# Altium PCB PCB1.PcbDoc
Units mm, origin at the board's own origin, x right, y up, seen from the top; angles counter-clockwise.
Board outline 86.71 x 68.58 mm, 2 copper layers (Top Layer, Bottom Layer), stack 1.569 mm thick; 33 components, 57 nets, 206 pads, 2 vias.
Unrouted connection lines stored in the file: 17.
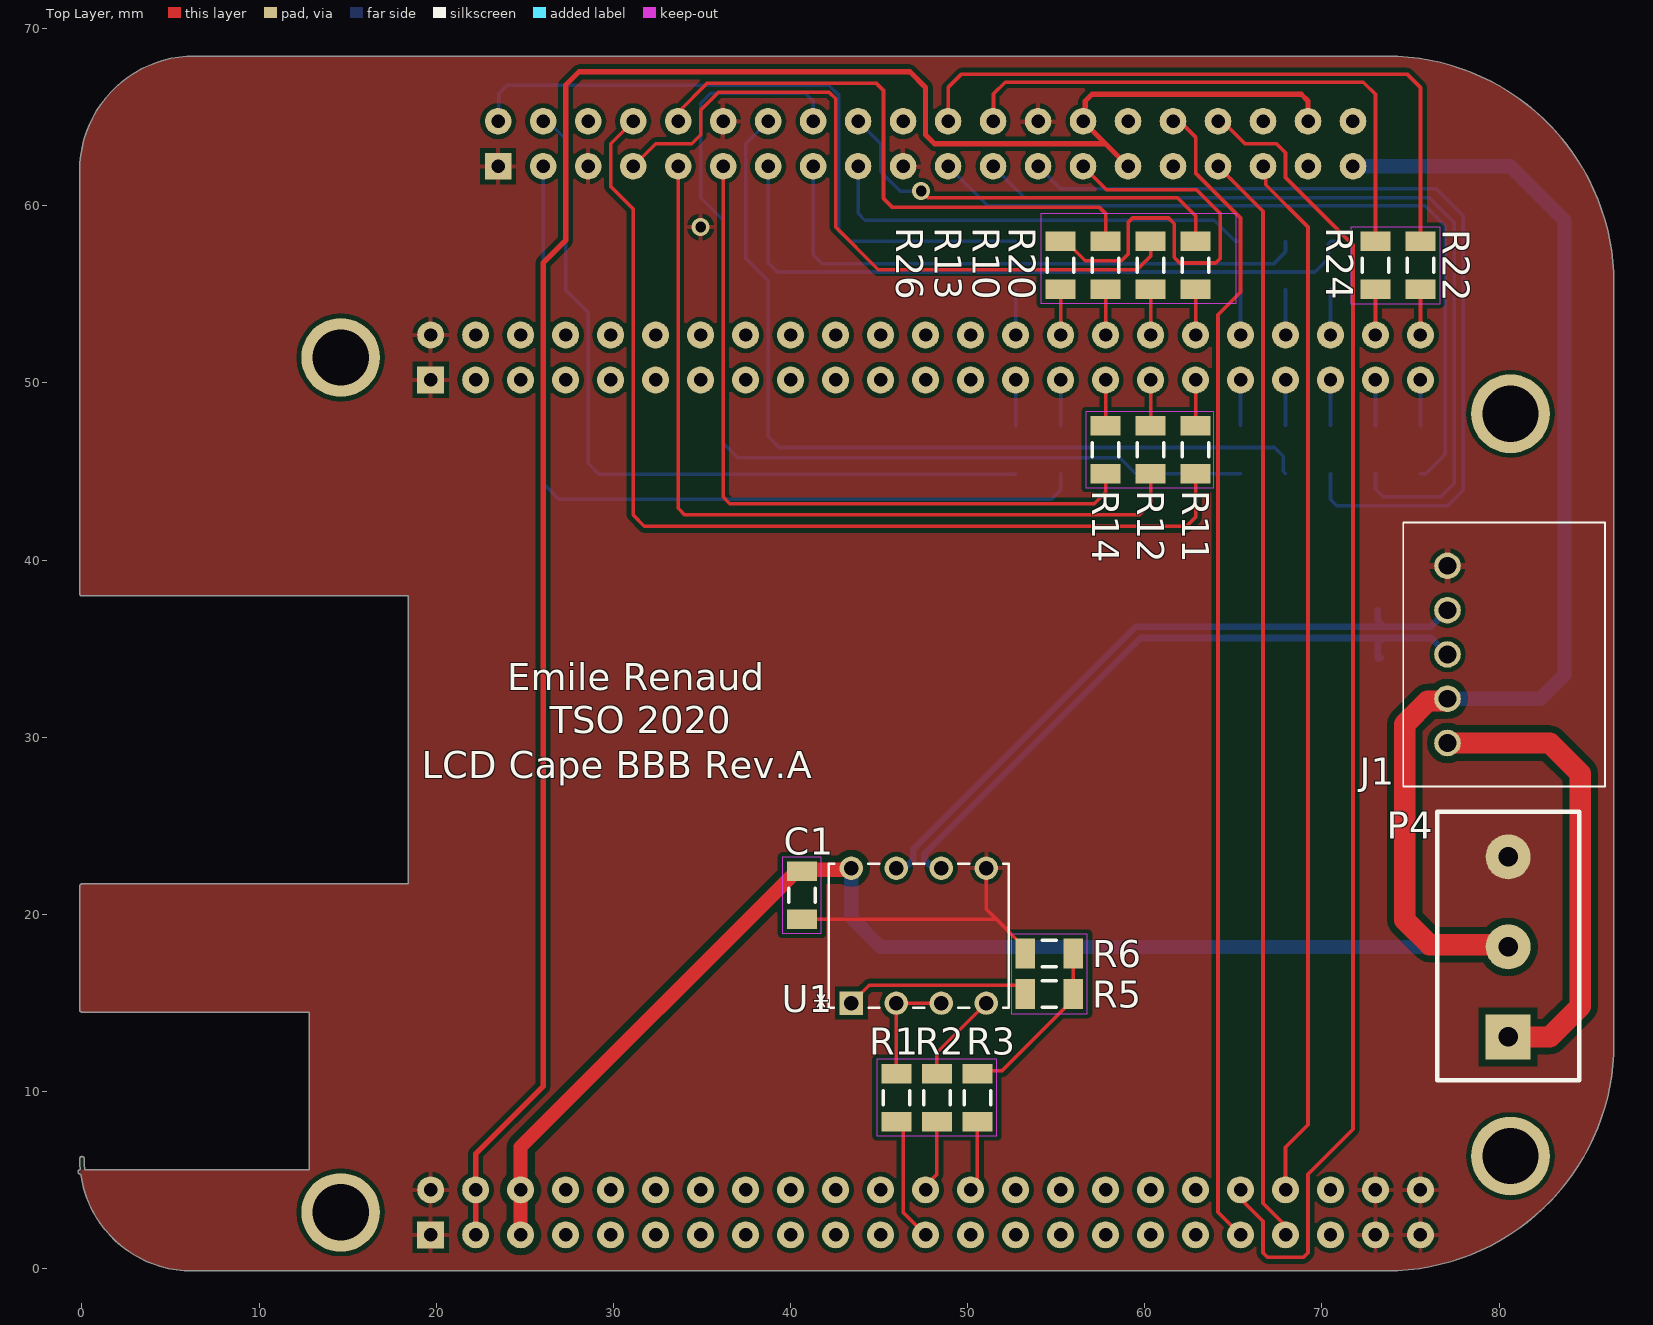
[diagram p0: Top Layer view]
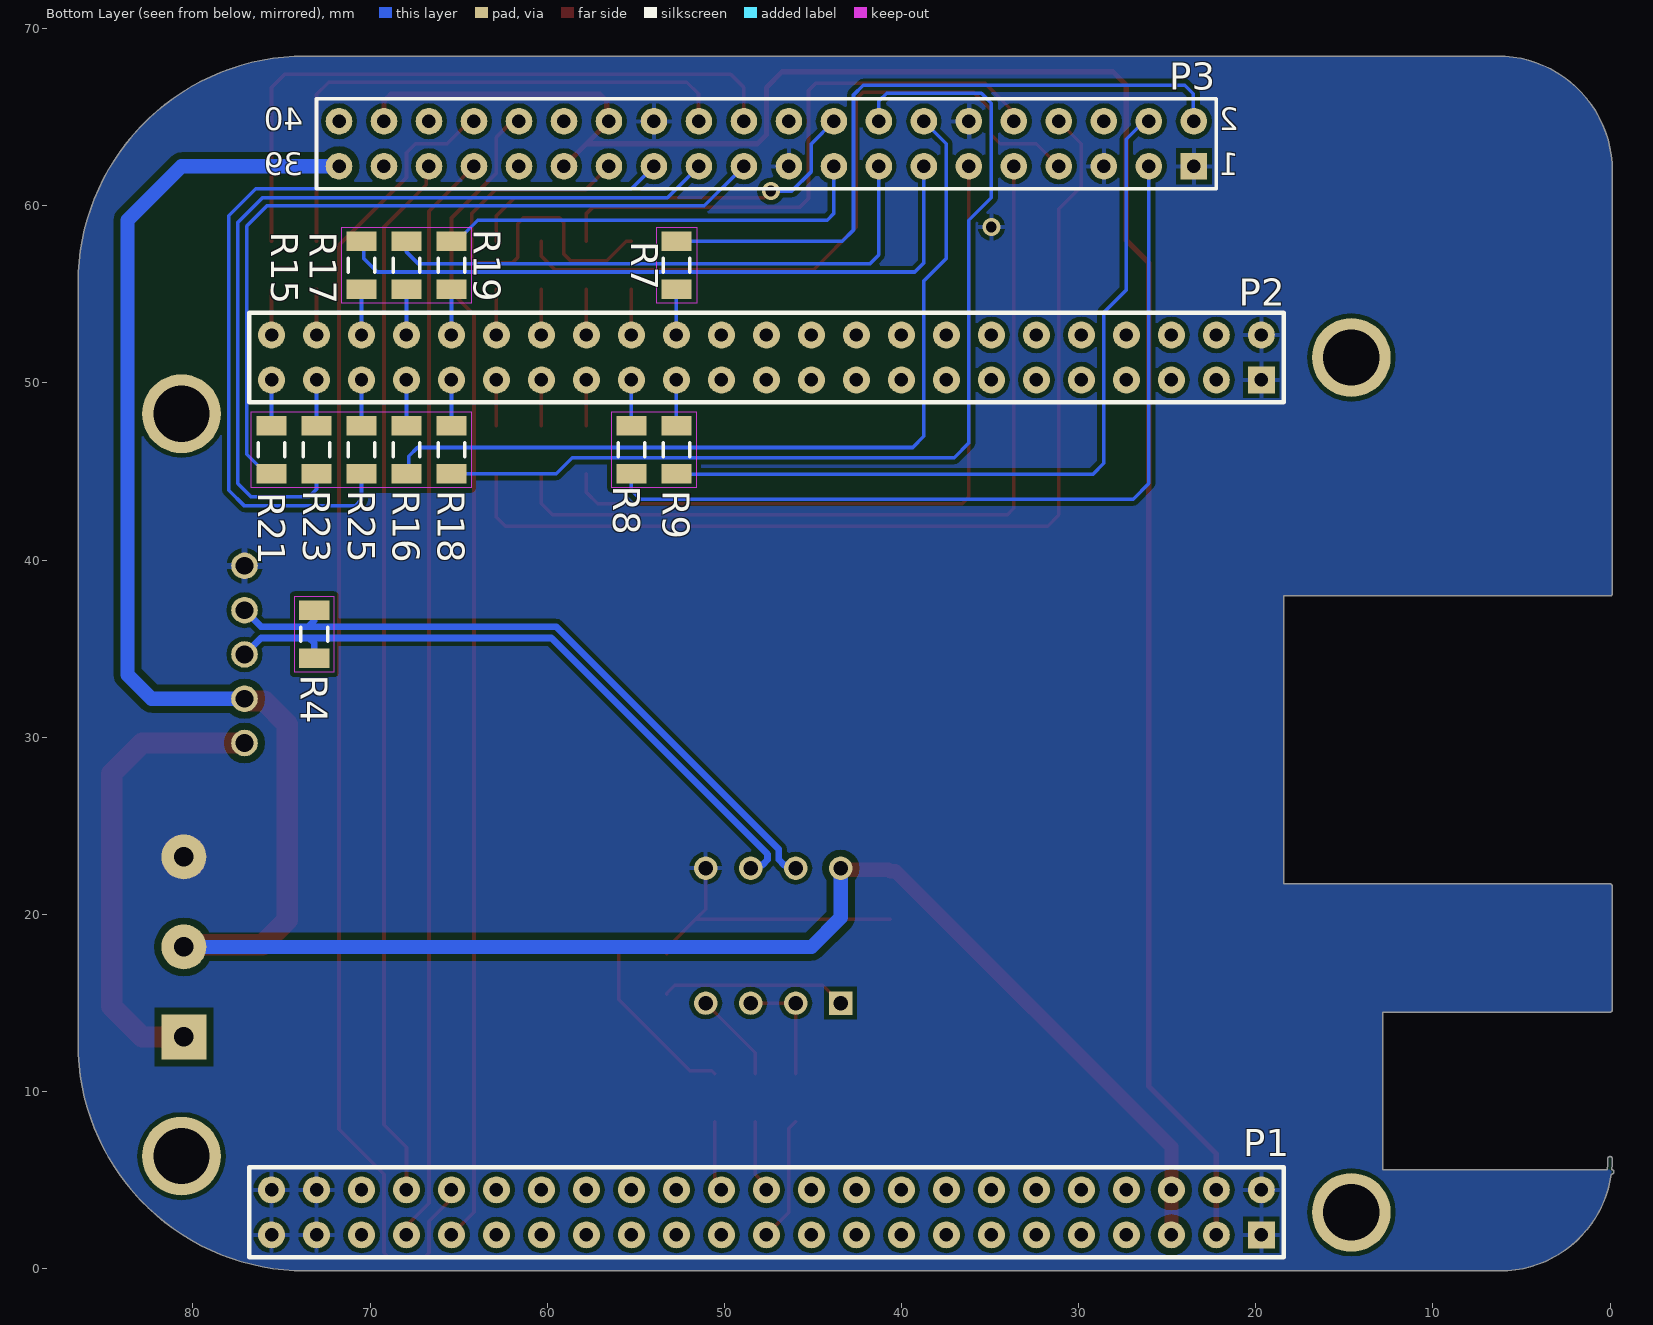
[diagram p1: Bottom Layer view, seen from below]

## Layer stack, top to bottom
Top Solder: solder mask 0.0254, SM-001, Dk 4
Top Layer: signal copper 0.035
Dielectric 1: core 1.4986, Core-043, Dk 4.3
Bottom Layer: signal copper 0.035
Bottom Solder: solder mask 0.0254, SM-001, Dk 4

## Board outline
-0.093,5.334 cw(c-0.093,5.461) -0.098,5.588 cw(c6.202,6.202) -0.127,6.202 cw(c0,6.202) 0.127,6.202 ccw(c6.202,6.202) 0.158,5.588 12.827,5.588 12.827,14.478 0,14.478 cw(c0,14.605) -0.127,14.605 -0.127,21.59 cw(c0,21.59) 0,21.717 18.415,21.717 18.415,37.973 0,37.973 cw(c0,38.1) -0.127,38.1 -0.127,61.976 cw(c6.35,61.976) 6.35,68.453 73.66,68.453 cw(c73.66,55.626) 86.487,55.626 86.487,12.7 cw(c73.66,12.7) 73.66,-0.127 6.202,-0.127 cw(c6.202,6.202) -0.068,5.334

## Design rules (kind name [scope] priority, off if disabled: settings)
Clearance Clearance_Power [InNet('+12') or InNet('5V')] p1: gap=0.381 ignorepadtopadclearanceinfootprint=FALSE
Clearance [All] p2: gap=0.254 ignorepadtopadclearanceinfootprint=FALSE except(0: Arc-Hole Track-Hole SMDPad-Hole THPad-Hole Via-Hole Fill-Hole Poly-Hole Region-Hole Text-Hole)
DiffPairsRouting [All] p1: maxlimit=0.254 minlimit=0.254 mostfreqgap=0.254 toplayer_minwidth=0.381 toplayer_maxwidth=0.381 toplayer_prefwidth=0.381 bottomlayer_minwidth=0.381 bottomlayer_maxwidth=0.381 bottomlayer_prefwidth=0.381 maxuncoupledlength=12.7
HoleSize [All] p1: absolutevalues=TRUE maxlimit=3.175 minlimit=0.025 maxpercent=80.000 minpercent=20.000
PolygonConnect [All] p1: connectstyle=Relief reliefconductorwidth=0.254 reliefentries=4 polygonreliefangle="90 Angle" airgapwidth=0.254
RoomDefinition "LCD Cape" [InComponentClass('LCD Cape')] p1 off: confinementstyle=ConfineIn formatcopy=TRUE lockcomponents=FALSE outline 87.612,1.529 296.654,1.529 296.654,59.822 87.612,59.822
RoutingVias [All] p1: holewidth=0.711 width=1 viastyle="Through Hole" minholewidth=0.2 minwidth=0.45 maxholewidth=0.6 maxwidth=1.27
SilkToSilkClearance [All] p1 off: silktosilkclearance=0.254
SilkToSolderMaskClearance [IsPad] p1 off: minsilkscreentomaskgap=0.254 clearancetoexposedcopper=TRUE
SolderMaskExpansion [All] p1: expansion=0.102 istentingtop=FALSE
Width Width_Power [InNet('+12') or InNet('5V')] p1: maxlimit=1.2 minlimit=0.2 preferedwidth=1.2 minimp=50.000000 maximp=50.000000 favimp=50.000000
Width [All] p2: maxlimit=0.3 minlimit=0.2 preferedwidth=0.2 minimp=50.000000 maximp=50.000000 favimp=50.000000
26 further rules are at their usual default settings.

## Classes and differential pairs
differential pair RS: +RS_P -RS_N

## Components (designator, comment, footprint, x,y, rotation, side; value= is the part's Value field where it differs from the comment)
C1 "Capacitor 1206" C1206 40.64,21.082 r90 top value=0.1uF
J1 "Motor Out" "JST 5POS 2.5mm 90°" 77.089,29.671 r270 top
P1 "Header 23x2" "Header 23x2" 47.625,3.175 r0 bottom locked
P2 "Header 23x2" "Header 23x2" 47.625,51.435 r0 bottom locked
P3 "LCD" HDR2X20 23.495,62.23 r0 bottom
P4 "Power In" "Weco 3" 80.518,18.161 r90 top
R1 "Res1" C1206 45.974,9.652 r270 top value=0R
R2 "Res1" C1206 48.26,9.652 r90 top value=0R
R3 "Res1" C1206 50.546,9.652 r90 top value=0R
R4 "Res1" C1206 73.152,35.814 r90 bottom value=120R
R5 "Res1" C1206 54.61,15.494 r0 top value=1K
R6 "Res1" C1206 54.61,17.78 r180 top value=1K
R7 "Res1" C1206 52.705,56.642 r270 bottom value=30R
R8 "Res1" C1206 55.245,46.228 r270 bottom value=30R
R9 "Res1" C1206 52.705,46.228 r90 bottom value=30R
R10 "Res1" C1206 60.325,56.642 r90 top value=30R
R11 "Res1" C1206 62.865,46.228 r90 top value=30R
R12 "Res1" C1206 60.325,46.228 r270 top value=30R
R13 "Res1" C1206 57.785,56.642 r270 top value=30R
R14 "Res1" C1206 57.785,46.228 r270 top value=30R
R15 "Res1" C1206 70.485,56.642 r90 bottom value=30R
R16 "Res1" C1206 67.945,46.228 r90 bottom value=30R
R17 "Res1" C1206 67.945,56.642 r90 bottom value=30R
R18 "Res1" C1206 65.405,46.228 r90 bottom value=30R
R19 "Res1" C1206 65.405,56.642 r90 bottom value=30R
R20 "Res1" C1206 62.865,56.642 r270 top value=30R
R21 "Res1" C1206 75.565,46.228 r270 bottom value=30R
R22 "Res1" C1206 75.565,56.642 r270 top value=30R
R23 "Res1" C1206 73.025,46.228 r270 bottom value=30R
R24 "Res1" C1206 73.025,56.642 r270 top value=30R
R25 "Res1" C1206 70.485,46.228 r270 bottom value=30R
R26 "Res1" C1206 55.245,56.642 r90 top value=30R
U1 "MAX485CPA+" "DIP 8 - 3D" 51.054,22.606 r90 top value=Value

## Footprints (in the part's own frame and the unit in brackets; to place one, negate y for a bottom-side part, rotate by r counter-clockwise, add the part's x,y. Pads: shape width x height; smd on the part's side, far side on the other; paste and mask are expansions set on the pad)
C1206 [mm] "Chip Capacitor, Body 3.2x1.6mm, IPC High Density"
  rect 1.1x1.7 smd: 1(-1.35,0) 2(1.35,0)
  silkscreen extent -0.4,-0.75 0.4,0.75, body extent -1.7,-0.9 1.7,0.9, height 1.3
"DIP 8 - 3D" [mil]
  rect 52x52 hole 32: 1(-300,300)
  round 52 hole 32: 2(-300,200) 3(-300,100) 4(-300,0) 5(0,0) 6(0,100) 7(0,200) 8(0,300)
  silkscreen extent -310,-50 10,350, body extent -310,-45 10,345, height 185
HDR2X20 [mm] "Connector; Header; 20x2 Position"
  rect 1.5x1.5 hole 0.762: 1(0,0)
  round 1.5 hole 0.762: 2(0,-2.54) 3(2.54,0) 4(2.54,-2.54) 5(5.08,0) 6(5.08,-2.54) 7(7.62,0) 8(7.62,-2.54) 9(10.16,0) 10(10.16,-2.54) 11(12.7,0) 12(12.7,-2.54) 13(15.24,0) 14(15.24,-2.54) 15(17.78,0) 16(17.78,-2.54) 17(20.32,0) 18(20.32,-2.54) 19(22.86,0) 20(22.86,-2.54) 21(25.4,0) 22(25.4,-2.54) 23(27.94,0) 24(27.94,-2.54) 25(30.48,0) 26(30.48,-2.54) 27(33.02,0) 28(33.02,-2.54) 29(35.56,0) 30(35.56,-2.54) 31(38.1,0) 32(38.1,-2.54) 33(40.64,0) 34(40.64,-2.54) 35(43.18,0) 36(43.18,-2.54) 37(45.72,0) 38(45.72,-2.54) 39(48.26,0) 40(48.26,-2.54)
  silkscreen extent -1.27,-3.81 49.53,1.27
"Header 23x2" [mil]
  rect 60x60 hole 30: 1(-1100,50)
  round 60 hole 30: 2(-1100,-50) 3(-1000,50) 4(-1000,-50) 5(-900,50) 6(-900,-50) 7(-800,50) 8(-800,-50) 9(-700,50) 10(-700,-50) 11(-600,50) 12(-600,-50) 13(-500,50) 14(-500,-50) 15(-400,50) 16(-400,-50) 17(-300,50) 18(-300,-50) 19(-200,50) 20(-200,-50) 21(-100,50) 22(-100,-50) 23(0,50) 24(0,-50) 25(100,50) 26(100,-50) 27(200,50) 28(200,-50) 29(300,50) 30(300,-50) 31(400,50) 32(400,-50) 33(500,50) 34(500,-50) 35(600,50) 36(600,-50) 37(700,50) 38(700,-50) 39(800,50) 40(800,-50) 41(900,50) 42(900,-50) 43(1000,50) 44(1000,-50) 45(1100,50) 46(1100,-50)
  silkscreen extent -1150,-100 1150,100
"JST 5POS 2.5mm 90°" [mm]
  round 1.5 hole 1: 1(0,0) 2(-2.5,0) 3(-5,0) 4(-7.5,0) 5(-10,0)
  silkscreen extent -12.45,-2.5 2.45,8.9, body extent -12.45,-2.5 2.45,8.9, height 6.1
"Weco 3" [mm]
  rect 2.54x2.54 hole 1.1: 1(-5.08,0)
  round 2.54 hole 1.1: 2(0,0) 3(5.08,0)
  silkscreen extent -7.54,-4 7.62,4, body extent -7.54,-4 7.62,4, height 10

## Part data
C1: "Capacitor SMD 1206", Manufacturer_Part_Number=12065A820JAT2A, Built_By=EMA_UL_Team, Copyright="Copyright (C) 2018 Accelerated Designs. All rights reserved", RefDes=RefDes, Type=DEV, Vendor="AVX Corporation"
J1: library part "JST 5POS", "Connector", Manufacturer_Name="JST (JAPAN SOLDERLESS TERMINALS)", Manufacturer_Part_Number=S5B-XH-A-1(LF)(SN), Datasheet Link=http://www.jst-mfg.com/product/pdf/eng/eXH.pdf, Height=6.1mm
P3: library part "Header 20X2", "Header, 20-Pin, Dual row", LatestRevisionDate=17-Jul-2002, LatestRevisionNote="Re-released for DXP Platform.", Publisher="Altium Limited"
P4: library part "Header 3", "Header, 3-Pin", LatestRevisionDate=17-Jul-2002, LatestRevisionNote="Re-released for DXP Platform.", Publisher="Altium Limited"
R1 R2 R3 R4 R5 R6 R7 R8 R9 R10 R11 R12 R13 R14 R15 R16 R17 R18 R19 R20 R21 R22 R23 R24 R25 R26: "Resistor", LatestRevisionDate=17-Jul-2002, LatestRevisionNote="Re-released for DXP Platform.", PackageDescription="Axial Device, Thru-Hole; 2 Leads; 0.3 in Pin Spacing", PackageReference=AXIAL-0.3, Published=8-Jun-2000, Publisher="Altium Limited"
U1: "RS485 Communication", Built_By=EMA_UL_Team, Copyright="Copyright (C) 2018 Accelerated Designs. All rights reserved", Manufacturer_Part_Number=MAX485CPA+, RefDes=RefDes, Type=DEV, Vendor="Maxim Integrated Products"

## Free pads (board coordinates)
  round 4.445 hole 3.175: 28(14.605,3.175) 29(80.645,6.35) 30(80.645,48.26) 31(14.605,51.435)

## Via types
v1: diameter 1, hole 0.6, Top Layer to Bottom Layer, 2 vias

## Nets (pads, with @x,y where several pads share a name; then routed paths per layer and width w, separated by ;. In a path a pad name is that pad's centre, name@x,y a point inside that pad or via, vN(x,y) a via of type N, cw(c..) or ccw(c..) an arc to the next point about the centre after c; other vN are vias at no path point)
3.3V: P1.3 P1.4 P3.28 P3.29 P3.38 | length 119.9
  Top Layer w0.2: P3.28 P3.28@56.642,64.897
  Top Layer w0.3: P1.3 P1.4 22.225,6.477 26.035,10.287 26.035,56.769 27.305,58.039 27.305,66.802 28.067,67.564 46.736,67.564 47.625,66.675 47.625,64.008 48.133,63.5 57.785,63.5 ; P3.28 57.785,63.5 ; P3.28@56.642,64.897 56.642,65.913 57.023,66.294 68.834,66.294 69.215,65.913 P3.38 ; P3.29 57.785,63.5
5V: C1.2 J1.2 P1.5 P1.6 P3.39 P4.2 U1.8 | length 137.3
  Top Layer w0.8: P1.5 P1.6 24.765,6.857 40.34,22.432 C1.2 40.727,22.519 43.347,22.519 U1.8 ; J1.2@76.955,32.037 J1.2 ; P4.2@80.391,18.288 P4.2
  Top Layer w1.2: J1.2@76.955,32.037 75.979,32.037 74.676,30.734 74.676,19.685 76.073,18.288 P4.2@80.391,18.288
  Bottom Layer w0.8: U1.8 43.434,19.812 45.085,18.161 P4.2 ; P3.39 80.645,62.23 83.693,59.182 83.693,33.528 82.336,32.171 J1.2
+12: J1.1 P4.1 | length 26.1
  Top Layer w1.2: J1.1 82.859,29.671 84.582,27.948 84.582,14.804 82.859,13.081 P4.1
AIN_0: P1.39 P3.33 | length 61.9
  Top Layer w0.2: P3.33 66.675,59.69 66.675,3.683 67.772,2.586 67.772,2.078 P1.39
AIN_1: P1.40 P3.35 | length 59.4
  Top Layer w0.2: P3.35 66.836,62.069 66.836,61.18 69.215,58.801 69.215,8.128 67.945,6.858 P1.40
AIN_2: P1.37 P3.32 | length 65.7
  Top Layer w0.2: P3.32 61.666,64.699 62.047,64.699 62.865,63.881 62.865,61.849 65.405,59.309 65.405,55.118 64.135,53.848 64.135,3.175 P1.37
AIN_3: P1.38 P3.34 | length 76.1
  Top Layer w0.2: P3.34 64.389,64.77 65.659,63.5 67.437,63.5 67.945,62.992 67.945,61.595 71.755,57.785 71.755,7.874 69.215,5.334 69.215,0.889 68.961,0.635 66.929,0.635 66.675,0.889 66.675,2.667 65.405,3.937 P1.38
GND: C1.1 J1.5 P1.1 P1.2 P1.43 P1.44 P1.45 P1.46 P2.1 P2.2 P3.1 P3.5 P3.12 P3.19 P3.26 P4.3 R6.2 U1.5 | length 16.7
  Top Layer w0.2: C1.1 51.608,19.732 ; U1.5 51.054,20.286 51.608,19.732 ; R6.2 53.26,18.08 51.608,19.732
  other v1: 34.925,58.801
LCD_AC_BIAS: P2.30 R26.1 | length 2.6
  Top Layer w0.2: P2.30 R26.1
LCD_DATA_0: P2.45 R21.1 | length 2.6
  Bottom Layer w0.2: R21.1 P2.45
LCD_DATA_1: P2.46 R22.2 | length 2.6
  Top Layer w0.2: P2.46 R22.2
LCD_DATA_2: P2.43 R23.1 | length 2.6
  Bottom Layer w0.2: R23.1 P2.43
LCD_DATA_3: P2.44 R24.2 | length 2.6
  Top Layer w0.2: P2.44 R24.2
LCD_DATA_4: P2.41 R25.1 | length 2.6
  Bottom Layer w0.2: R25.1 P2.41
LCD_DATA_5: P2.42 R15.1 | length 2.6
  Bottom Layer w0.2: P2.42 R15.1
LCD_DATA_6: P2.39 R16.2 | length 2.6
  Bottom Layer w0.2: R16.2 P2.39
LCD_DATA_7: P2.40 R17.1 | length 2.6
  Bottom Layer w0.2: P2.40 R17.1
LCD_DATA_8: P2.37 R18.2 | length 2.6
  Bottom Layer w0.2: R18.2 P2.37
LCD_DATA_9: P2.38 R19.1 | length 2.6
  Bottom Layer w0.2: P2.38 R19.1
LCD_DATA_10: P2.35 R11.2 | length 2.6
  Top Layer w0.2: R11.2 P2.35
LCD_DATA_11: P2.36 R20.2 | length 2.6
  Top Layer w0.2: P2.36 R20.2
LCD_DATA_12: P2.33 R12.1 | length 2.6
  Top Layer w0.2: R12.1 P2.33
LCD_DATA_13: P2.34 R10.1 | length 2.6
  Top Layer w0.2: P2.34 R10.1
LCD_DATA_14: P2.31 R14.1 | length 2.6
  Top Layer w0.2: R14.1 P2.31
LCD_DATA_15: P2.32 R13.2 | length 2.6
  Top Layer w0.2: P2.32 R13.2
LCD_HSYNC: P2.29 R8.1 | length 2.6
  Bottom Layer w0.2: R8.1 P2.29
LCD_PCLK: P2.28 R7.2 | length 2.6
  Bottom Layer w0.2: P2.28 R7.2
LCD_VSYNC: P2.27 R9.2 | length 2.6
  Bottom Layer w0.2: R9.2 P2.27
NetP1_23: P1.23 R1.2 | length 7.1
  Top Layer w0.2: R1.2 46.355,7.921 46.355,3.175 P1.23
NetP1_24: P1.24 R2.1 | length 4.1
  Top Layer w0.2: P1.24 47.625,4.677 48.26,5.312 R2.1
NetP1_26: P1.26 R3.1 | length 4
  Top Layer w0.2: P1.26 50.546,4.826 R3.1
NetP3_2: P3.2 R7.1 | length 39.6
  Top Layer w0.2: P3.2@23.656,64.931 P3.2 P3.2@23.744,64.521
  Bottom Layer w0.2: P3.2 23.529,64.804 23.529,66.328 24.003,66.802 42.164,66.802 42.711,66.255 42.711,58.635 43.354,57.992 R7.1
NetP3_3: P3.3 R8.2 | length 48.6
  Bottom Layer w0.2: P3.3 26.035,44.323 26.924,43.434 54.737,43.434 55.245,43.942 R8.2
NetP3_4: P3.4 R9.1 | length 44.9
  Bottom Layer w0.2: P3.4 26.289,64.77 27.305,63.754 27.305,55.245 28.575,53.975 28.575,45.466 29.21,44.831 52.658,44.831 R9.1
NetP3_7: P3.7 R10.2 | length 41.3
  Top Layer w0.2: P3.7 32.385,63.5 34.417,63.5 34.925,64.008 34.925,65.405 35.941,66.421 42.164,66.421 42.545,66.04 42.545,58.801 44.958,56.388 59.563,56.388 60.325,57.15 R10.2
NetP3_8: P3.8 R11.1 | length 58
  Top Layer w0.2: P3.8 29.845,63.5 29.845,61.087 31.115,59.817 31.115,42.545 31.75,41.91 62.357,41.91 62.865,42.418 R11.1
NetP3_9: P3.9 R12.2 | length 48.1
  Top Layer w0.2: P3.9 33.655,42.926 34.036,42.545 59.69,42.545 60.325,43.18 R12.2
NetP3_10: P3.10 R13.1 | length 33.5
  Top Layer w0.2: P3.10 33.655,65.278 35.306,66.929 44.831,66.929 45.251,66.509 45.251,60.413 45.759,59.905 49.11,59.905 57.443,59.905 57.785,59.563 R13.1
NetP3_11: P3.11 R14.2 | length 41.7
  Top Layer w0.2: P3.11 36.195,43.561 36.576,43.18 57.15,43.18 57.785,43.815 R14.2
NetP3_13: P3.13 R15.2 | length 38.9
  Bottom Layer w0.2: P3.13 38.735,56.769 39.243,56.261 69.596,56.261 70.358,57.023 70.358,57.865 R15.2 R15.2@70.785,57.992
NetP3_14: P3.14 R16.1 | length 49.4
  Bottom Layer w0.2: P3.14 37.465,63.5 37.465,57.023 38.735,55.753 38.735,46.99 39.37,46.355 67.32,46.355 67.818,45.857 67.818,45.005 R16.1
NetP3_15: P3.15 R17.2 | length 32.8
  Bottom Layer w0.2: P3.15 41.275,57.223 41.783,56.715 67.268,56.715 67.945,57.392 R17.2
NetP3_16: P3.16 R18.1 | length 57.5
  Bottom Layer w0.2: P3.16 41.275,65.913 40.84,66.348 35.487,66.348 34.925,65.786 34.925,60.452 36.195,59.182 36.195,46.609 37.022,45.782 58.578,45.782 59.482,44.878 R18.1
NetP3_17: P3.17 R19.2 | length 24.9
  Bottom Layer w0.2: P3.17 43.815,59.563 44.196,59.182 63.915,59.182 65.105,57.992 R19.2
NetP3_18: P3.18 R20.1 | length 23.6
  Top Layer w0.2: v1(47.371,60.833) 47.752,60.452 61.849,60.452 62.865,59.436 R20.1
  Bottom Layer w0.2: P3.18 45.085,63.5 45.085,61.939 46.191,60.833 v1(47.371,60.833)
NetP3_21: P3.21 R21.2 | length 44.2
  Bottom Layer w0.2: P3.21 51.127,59.998 75.819,59.998 76.962,58.855 76.962,45.975 75.865,44.878 R21.2
NetP3_22: P3.22 R22.1 | length 37.9
  Top Layer w0.2: P3.22 48.895,66.675 49.657,67.437 74.803,67.437 75.565,66.675 R22.1
NetP3_23: P3.23 R23.2 | length 47.9
  Bottom Layer w0.2: P3.23 53.213,60.452 76.073,60.452 77.47,59.055 77.47,44.323 76.708,43.561 73.46,43.561 73.025,43.996 R23.2
NetP3_24: P3.24 R24.1 | length 32
  Top Layer w0.2: P3.24 51.459,64.794 51.459,66.318 52.124,66.983 72.336,66.983 73.025,66.294 R24.1
NetP3_25: P3.25 R25.2 | length 50.1
  Bottom Layer w0.2: P3.25 55.245,60.96 76.454,60.96 77.978,59.436 77.978,43.942 77.089,43.053 70.847,43.053 70.485,43.415 R25.2
NetP3_27: P3.27 R26.2 | length 25.2
  Top Layer w0.2: R26.2 55.545,57.992 56.641,56.896 58.684,56.896 59.055,57.267 59.055,59.055 59.309,59.309 61.341,59.309 61.661,58.989 61.661,57.084 61.976,56.769 64.008,56.769 64.262,57.023 64.262,59.563 62.919,60.906 57.839,60.906 P3.27
NetR5_1: R5.1 U1.1 | length 10.5
  Top Layer w0.2: U1.1 44.45,16.002 52.81,16.002 53.26,15.552 R5.1
RS_N: J1.4 R4.2 U1.7 | length 38.6
  Bottom Layer w0.381: U1.7 46.154,22.786 46.632,22.786 46.926,23.08 46.926,23.659 59.506,36.239 73.489,36.239 ; R4.2 73.152,36.576 73.489,36.239 ; J1.4 76.156,36.239 73.489,36.239
RS_P: J1.3 R4.1 U1.6 | length 37.9
  Bottom Layer w0.381: U1.6 48.334,22.786 47.856,22.786 47.561,23.08 47.561,23.396 59.769,35.604 73.45,35.604 ; R4.1@73.318,34.464 R4.1 73.152,35.306 73.45,35.604 ; J1.3 76.156,35.604 73.45,35.604
RXTX_EN: R1.1 U1.2 U1.3 | length 6.5
  Top Layer w0.2: R1.1 U1.2 U1.3
UART1_RXD: R3.2 R5.2 R6.1 | length 9.7
  Top Layer w0.2: R3.2 50.72,11.176 51.942,11.176 55.96,15.194 R5.2 R6.1
UART1_TXD: R2.2 U1.4 | length 5.1
  Top Layer w0.2: R2.2 48.26,12.192 U1.4
pads on no net: P1.7 P1.8 P1.9 P1.10 P1.11 P1.12 P1.13 P1.14 P1.15 P1.16 P1.17 P1.18 P1.19 P1.20 P1.21 P1.22 P1.25 P1.27 P1.28 P1.29 P1.30 P1.31 P1.32 P1.33 P1.34 P1.35 P1.36 P1.41 P1.42 P2.3 P2.4 P2.5 P2.6 P2.7 P2.8 P2.9 P2.10 P2.11 P2.12 P2.13 P2.14 P2.15 P2.16 P2.17 P2.18 P2.19 P2.20 P2.21 P2.22 P2.23 P2.24 P2.25 P2.26 P3.6 P3.20 P3.30 P3.31 P3.36 P3.37 P3.40

## Polygon pours and split planes (outlines as drawn)
GND on Bottom Layer "Bottom Layer-GND" (solid, remove dead copper, pour order 1): -0.068,5.334 cw(c6.19,6.2) -0.098,5.588 12.827,5.588 12.827,14.478 0,14.478 cw(c0,14.605) -0.127,14.605 -0.127,21.59 cw(c0,21.59) 0,21.717 18.415,21.717 18.415,37.973 0,37.973 cw(c0,38.1) -0.127,38.1 -0.127,61.976 cw(c6.35,61.976) 6.35,68.453 73.66,68.453 cw(c73.66,55.626) 86.487,55.626 86.487,12.7 cw(c73.66,12.7) 73.66,-0.127 6.202,-0.127 cw(c6.202,6.202)
GND on Top Layer "Top Layer-GND" (solid, remove dead copper, pour order 0): -0.068,5.334 cw(c6.19,6.2) -0.098,5.588 12.827,5.588 12.827,14.478 0,14.478 cw(c0,14.605) -0.127,14.605 -0.127,21.59 cw(c0,21.59) 0,21.717 18.415,21.717 18.415,37.973 0,37.973 cw(c0,38.1) -0.127,38.1 -0.127,61.976 cw(c6.35,61.976) 6.35,68.453 73.66,68.453 cw(c73.66,55.626) 86.487,55.626 86.487,12.7 cw(c73.66,12.7) 73.66,-0.127 6.202,-0.127 cw(c6.202,6.202)

## Keep-outs
Top Layer:
  rectangle: 71.628,54.483 76.669,58.796
  rectangle: 54.141,54.488 65.151,59.563
  rectangle: 56.681,44.074 63.901,48.382
  rectangle: 39.536,18.928 41.744,23.236
  rectangle: 52.456,14.39 56.764,18.884
  rectangle: 44.87,7.498 51.65,11.806
Bottom Layer:
  rectangle: 72.048,33.66 74.256,37.968
  rectangle: 51.562,54.488 53.809,58.801
  rectangle: 64.301,54.488 71.589,58.796
  rectangle: 51.601,44.074 56.349,48.382
  rectangle: 64.301,44.069 76.708,48.382

## Silkscreen, mask and mechanical layers (free items; w line width, h text height)
Top Overlay:
  text "Emile Renaud" at 24.003,32.639 h1.52
  text "TSO 2020" at 26.416,30.226 h1.52
  text "LCD Cape BBB Rev.A" at 19.177,27.686 h1.52
Mechanical 2:
  lines w0.254: -0.064,21.59 18.479,21.59 18.479,38.1 -0.064,38.1 ; 0,14.351 12.7,14.351 12.7,5.461 0.127,5.461
Mechanical 3:
  lines w0.254: -0.635,0 0.635,0 ; -0.093,5.461 12.827,5.461 12.827,14.478 0,14.478 0,21.59 18.542,21.59 18.542,38.1 0,38.1 0,48.26 0,61.976 cw(c6.35,61.976) 6.35,68.326 73.66,68.326 cw(c73.66,55.626) 86.36,55.626 86.36,41.91 86.36,12.7 cw(c73.66,12.7) 73.66,0 6.202,0 cw(c6.202,6.202) 0,6.202 ; 0,-0.635 0,0.635

## Text inside footprints (layer, text, board x,y; h text height)
P3: Bottom Overlay "1" at 20.955,61.722 h1.27; Bottom Overlay "2" at 20.955,64.262 h1.27; Bottom Overlay "40" at 73.787,64.262 h1.27; Bottom Overlay "39" at 73.787,61.722 h1.27
U1: Mechanical 7 "Default Padstyle: EX52Y52D32P" at 58.064,9.588 h1.27 r90; Mechanical 7 "Pin 1 Padstyle: SX52Y52D32P" at 60.604,10.223 h1.27 r90; Mechanical 7 "Alt 1 Padstyle: OX60Y90D30P" at 61.874,10.223 h1.27 r90; Mechanical 7 "Alt 2 Padstyle: OX90Y60D30P" at 63.144,10.223 h1.27 r90; Mechanical 7 "0.1in/2.54mm" at 45.021,8.128 h0.64 r90; Mechanical 7 "0.3in/7.62mm" at 54.737,16.891 h0.64 r90; Mechanical 7 "0.31in/7.874mm" at 40.386,16.573 h0.64 r90; Mechanical 7 "0.39in/9.906mm" at 47.561,25.654 h0.64 r90; Top Overlay "*" at 42.647,14.668 h1.27 r90; Mechanical 13 "*" at 44.069,14.795 h1.27 r90